# Altium PCB Example_IMX5_GPX1.PcbDoc
Units mm, origin at the board's own origin, x right, y up, seen from the top; angles counter-clockwise.
Board outline 136.53 x 135.25 mm, 2 copper layers (Top Layer, Bottom Layer), stack 1.595 mm thick; 10 components, 17 nets, 112 pads, 0 vias.
Unrouted connection lines stored in the file: 55.
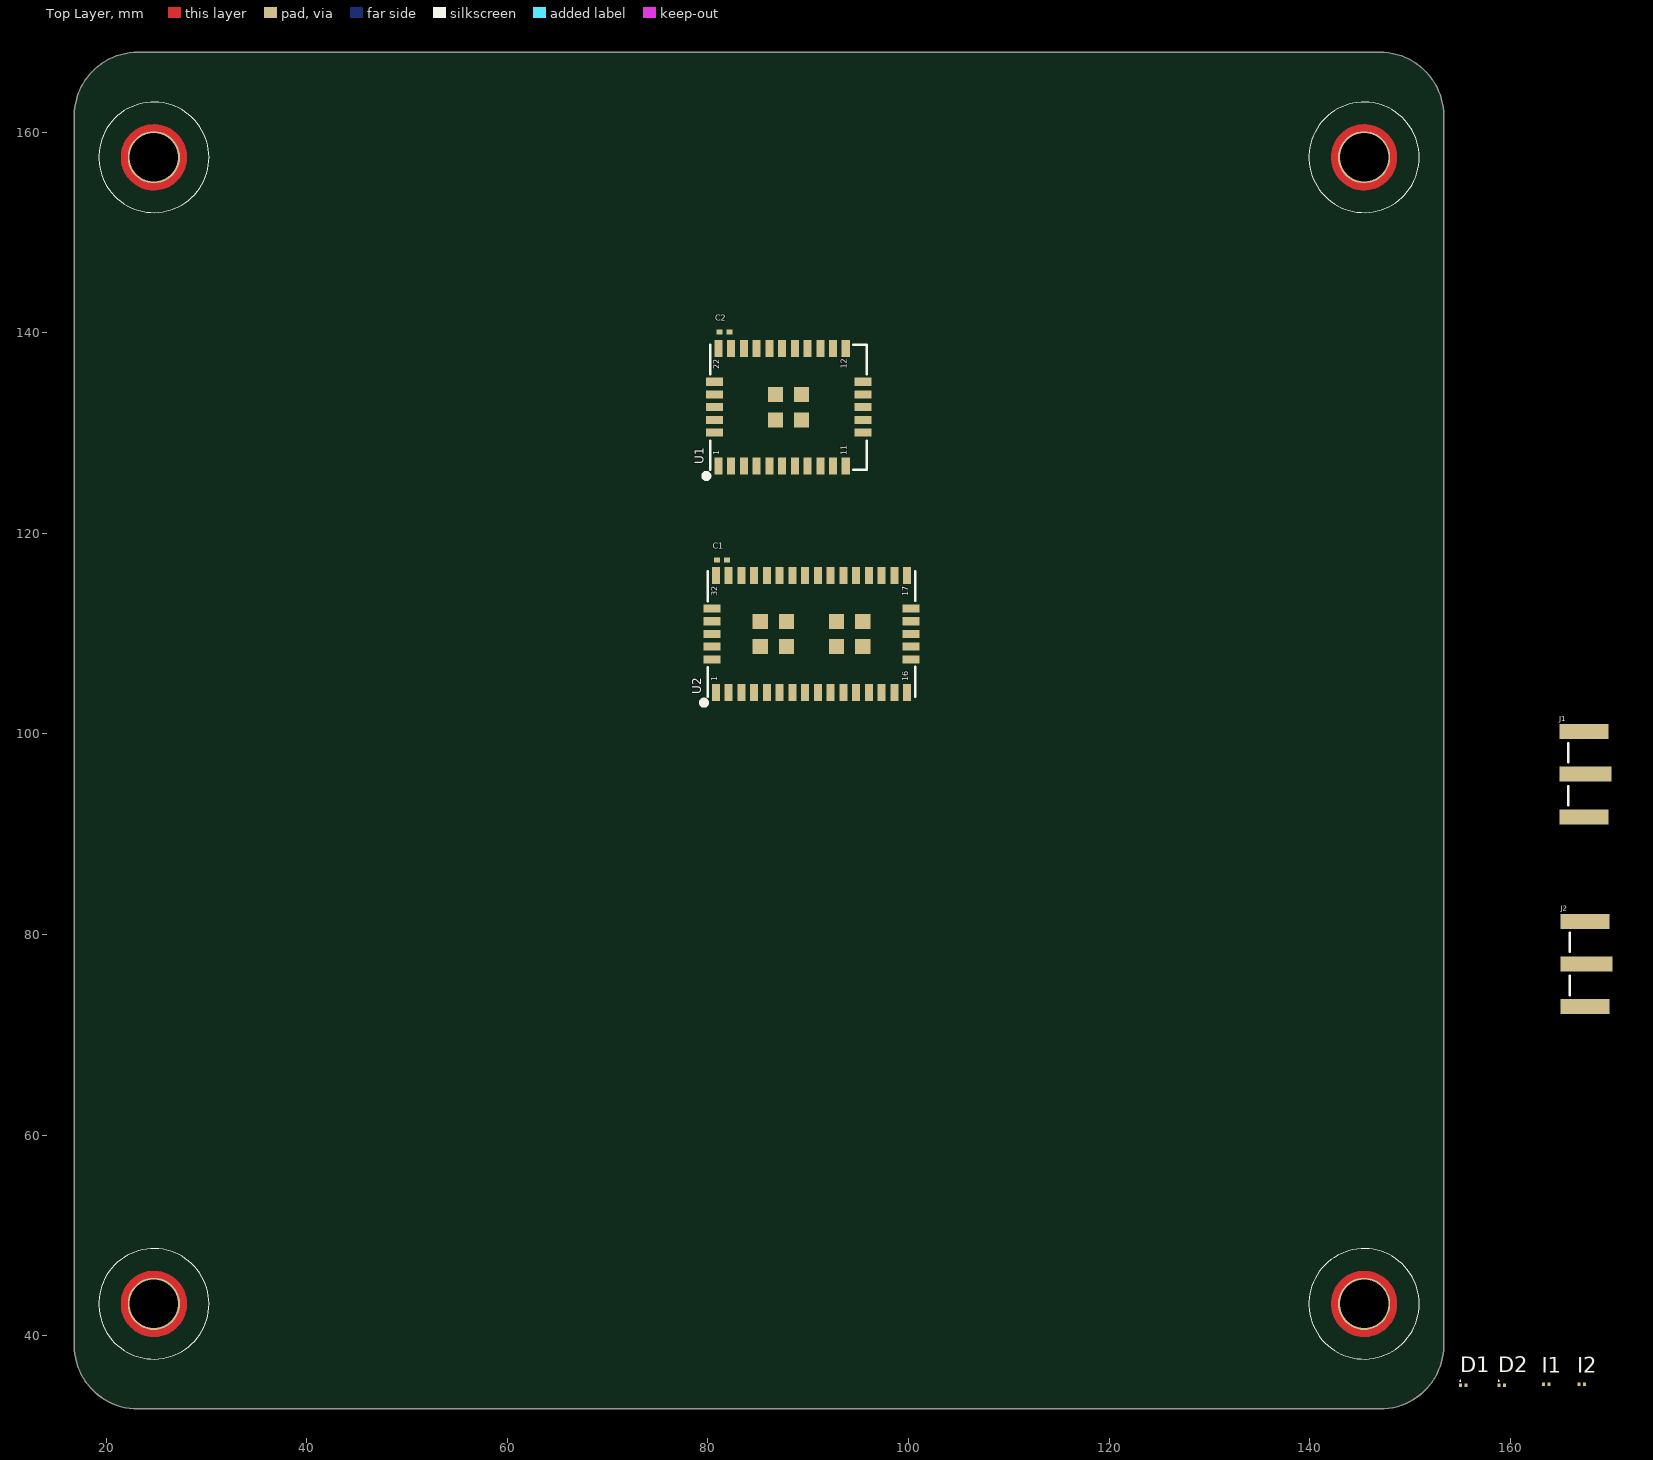
[diagram p0: Top Layer view]
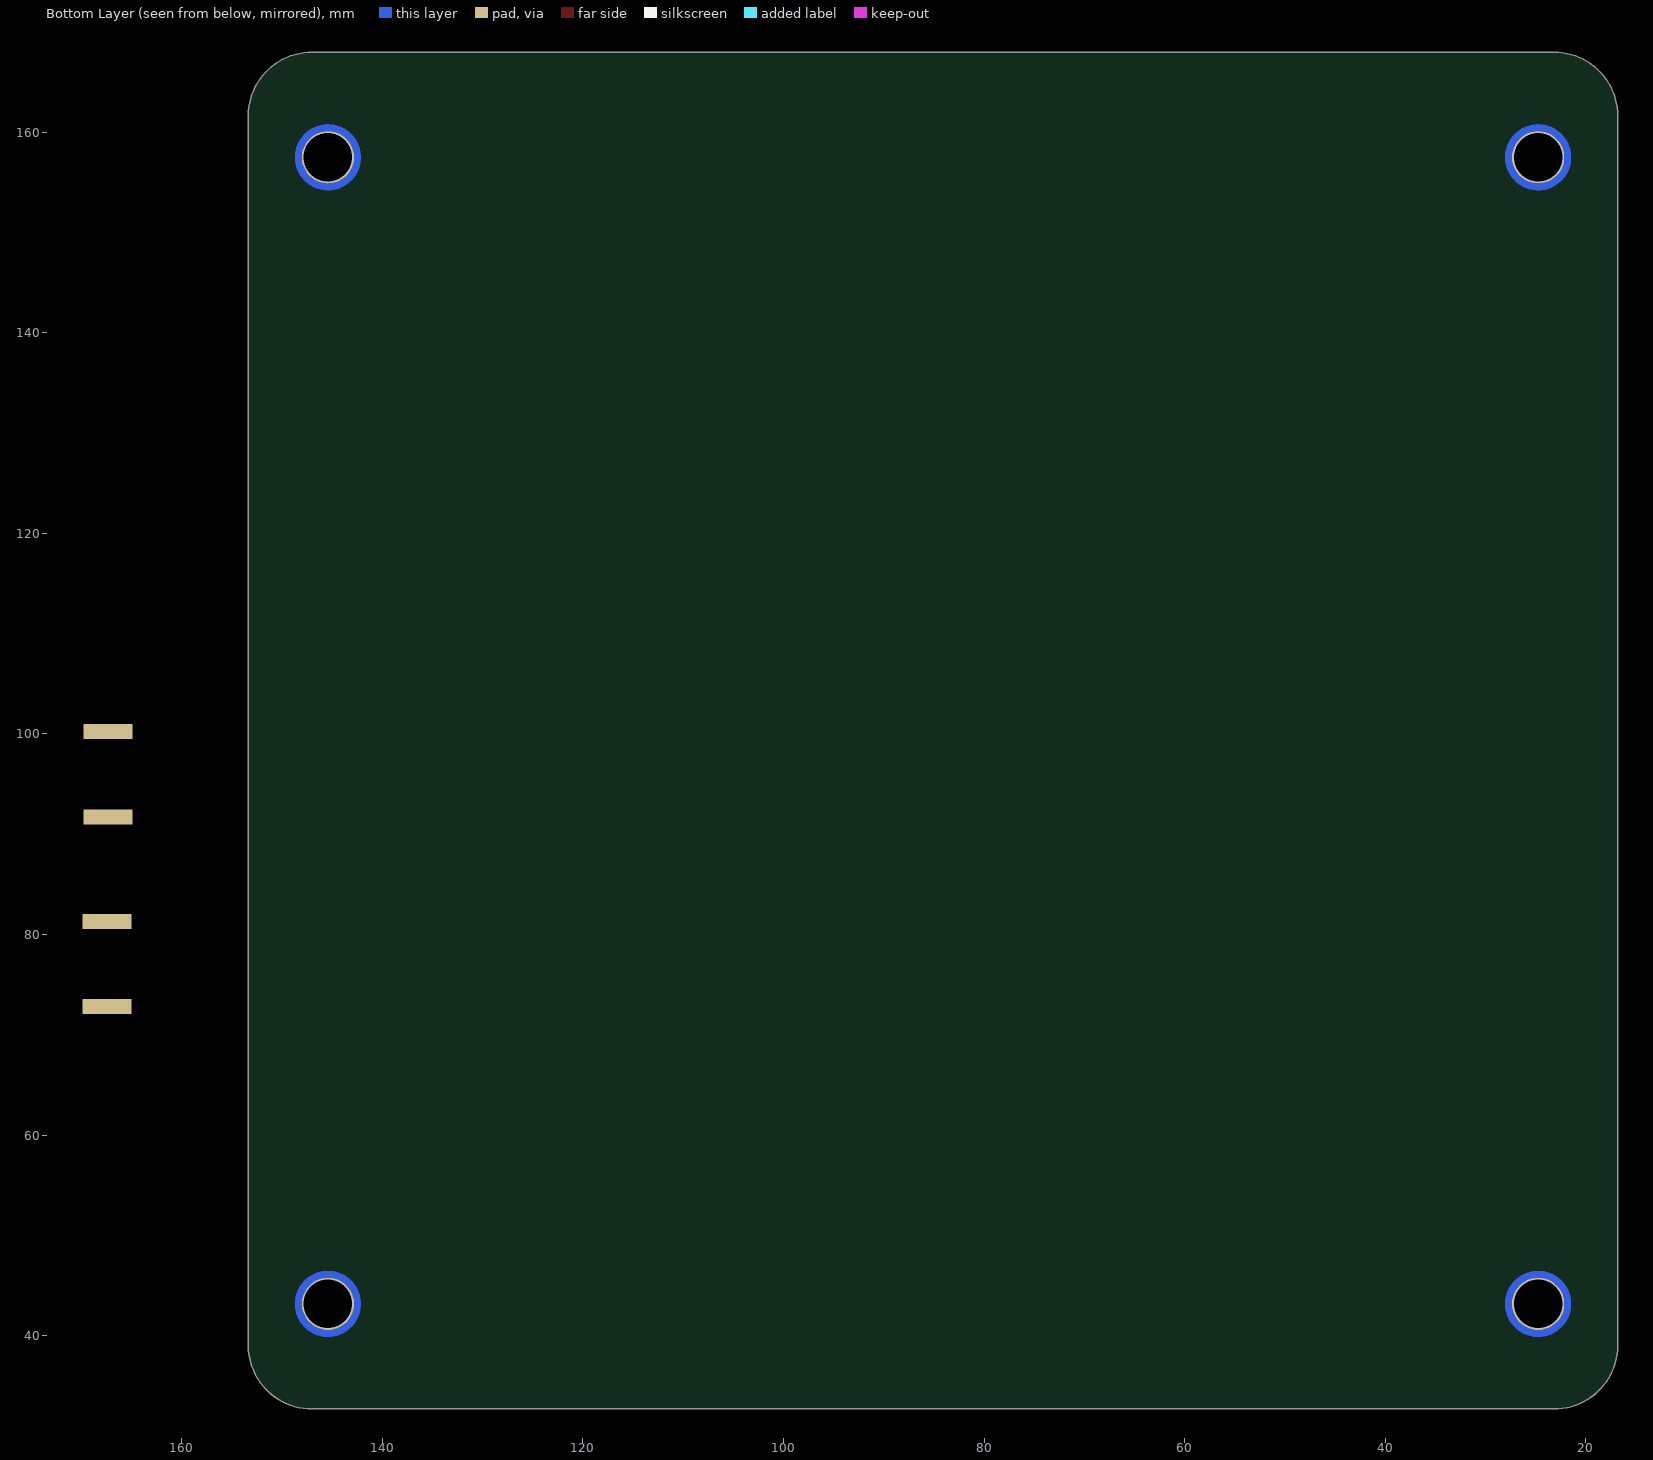
[diagram p1: Bottom Layer view, seen from below]

## Layer stack, top to bottom
Top Solder: solder mask 0.0102, Solder Resist, Dk 3.5
Top Layer: signal copper 0.0356
Dielectric 1: core 1.524, FR4, Dk 4.3
Bottom Layer: signal copper 0.0356
Bottom Solder: solder mask 0.0102, Solder Resist, Dk 3.5

## Board outline
16.828,39.052 16.827,161.607 cw(c23.177,161.607) 23.177,167.957 147.002,167.957 cw(c147.002,161.607) 153.352,161.607 153.352,39.052 cw(c147.002,39.052) 147.002,32.703 23.177,32.703 cw(c23.177,39.052)

## Design rules (kind name [scope] priority, off if disabled: settings)
AssemblyTestPointUsage [All] p1 off:
AssemblyTestpoint [All] p1 off: testpointundercomponent=TRUE minsize=1.016 maxsize=2.54 preferedsize=1.524 minholesize=0 maxholesize=1.016 preferedholesize=0.813 testpointgrid=0.025 usegrid=TRUE gridtolerance=0 allowsidetop=TRUE allowsidebottom=TRUE
BoardOutlineClearance [All] p1: gap=0.254 ignorepadtopadclearanceinfootprint=FALSE except(0: Arc-SplitContinuation Track-SplitContinuation SMDPad-SplitContinuation THPad-SplitContinuation Via-SplitContinuation Fill-SplitContinuation Poly-SplitContinuation Region-SplitContinuation Text-SplitContinuation; 0.508: Arc-OutlineEdge Track-OutlineEdge SMDPad-OutlineEdge THPad-OutlineEdge Via-OutlineEdge Fill-OutlineEdge Poly-OutlineEdge Region-OutlineEdge Text-OutlineEdge)
Clearance [All] p1: gap=0.127 ignorepadtopadclearanceinfootprint=FALSE except(0: Arc-Hole Track-Hole SMDPad-Hole THPad-Hole Via-Hole Fill-Hole Poly-Hole Region-Hole Text-Hole)
ComponentClearance Ignore [InComponent('H7')] p1: gap=-12.7 collisioncheckmode=3 verticalgap=-12.7 showdistances=FALSE
ComponentClearance HeaderClearance [InComponent('H1')] p2: gap=0.254 collisioncheckmode=3 verticalgap=-0.254 showdistances=FALSE
ComponentClearance Default [All] p3: gap=0.254 collisioncheckmode=3 verticalgap=0.254 showdistances=FALSE
ComponentClearance [All] p4: gap=0.254 collisioncheckmode=3 verticalgap=0.254 showdistances=FALSE
FabricationTestPointUsage [All] p1 off: valid=0 allowmultiple=FALSE
FabricationTestpoint [All] p1 off: side=3 testpointundercomponent=TRUE minsize=1.016 maxsize=2.54 preferedsize=1.524 minholesize=0 maxholesize=1.016 preferedholesize=0.813 testpointgrid=0.025 allowsidetop=TRUE allowsidebottom=TRUE usegrid=TRUE gridtolerance=0
HoleSize [All] p1: absolutevalues=TRUE maxlimit=2.54 minlimit=0.305 maxpercent=80.000 minpercent=20.000
MinimumAnnularRing [All] p1: minimumring=0.15
MinimumSolderMaskSliver MinimumSolderMaskSliver_Tight [HasFootprint('QFN40P300X300X105_HS-25L') OR HasFootprint('R0201x4') OR HasFootprint('R0201x2') OR HasFootprint('QFN50P300X200X60_HS-9L') OR HasFootprint('TSST8') OR HasFootprint('SOT23-8-65P280X145-8N') OR HasFootprint('TSOP65P640X120-24N') OR HasFootprint('SOTFL50P160X60-5N')] p1: minsoldermaskwidth=0.025
MinimumSolderMaskSliver [All] p2: minsoldermaskwidth=0.076
PlaneClearance [All] p1: clearance=0.127
PlaneConnect "Power Plane Connect Style" [All] p1: planeconnectstyle=Direct reliefexpansion=0.508 reliefentries=4 reliefconductorwidth=0.178 reliefairgap=0.254
PlaneConnect [All] p2: planeconnectstyle=Relief reliefexpansion=0.508 reliefentries=4 reliefconductorwidth=0.254 reliefairgap=0.254
PolygonConnect "Direct Connect" [InPolygonClass('NO THERMALS')] p1: connectstyle=Direct reliefconductorwidth=0.254 reliefentries=4 polygonreliefangle="90 Angle" airgapwidth=0.254
PolygonConnect "GND Vias" [InNet('GND') AND IsVia] p2: connectstyle=Direct reliefconductorwidth=0.254 reliefentries=4 polygonreliefangle="90 Angle" airgapwidth=0.254
PolygonConnect "Default Polygon Connect" [All] p3: connectstyle=Relief reliefconductorwidth=0.254 reliefentries=4 polygonreliefangle="90 Angle" airgapwidth=0.254
PolygonConnect [All] p4: connectstyle=Relief reliefconductorwidth=0.254 reliefentries=4 polygonreliefangle="90 Angle" airgapwidth=0.254
RoomDefinition Main [InComponentClass('Main')] p1: confinementstyle=ConfineIn formatcopy=TRUE lockcomponents=FALSE outline 0,0 50.8,0 50.8,25.4 0,25.4
RoutingVias [All] p1: holewidth=0.35 width=0.65 viastyle="Through Hole" minholewidth=0.3 minwidth=0.6 maxholewidth=0.4 maxwidth=0.7
ShortCircuit EmptyPad [InPadClass('All Pads') vs InNet('No Net')] p2: allowed=TRUE
SilkToSilkClearance [Not ( ((ObjectKind = 'Text') And ((UseInvertedRectangle = 'True') OR (IsTextInverted = 'True'))) OR (ObjectKind = 'Fill') ) vs Not ( ((ObjectKind = 'Text') And ((UseInvertedRectangle = 'True') OR (IsTextInverted = 'True'))) OR (ObjectKind = 'Fill') )] p1: silktosilkclearance=0.076
SilkToSolderMaskClearance SilkscreenOverComponentPads [NOT(IsPad AND OnLayer('Multi-Layer'))] p1: minsilkscreentomaskgap=0 clearancetoexposedcopper=TRUE
SilkToSolderMaskClearance [IsPad] p2: minsilkscreentomaskgap=0.1 clearancetoexposedcopper=TRUE
SolderMaskExpansion Tented [IsVia AND (InNet('VIN') OR InNet('VINP') OR InNet('+3.3V'))] p1: expansion=-0.762 istentingtop=FALSE
SolderMaskExpansion "SolderMaskExpansion GND Vias" [IsVia AND InNet('GND')] p2: expansion=-0.762 istentingtop=FALSE
SolderMaskExpansion "SolderMaskExpansion Vias" [IsVia] p3: expansion=-0.762 istentingtop=FALSE
SolderMaskExpansion "Solder Mask Expansion" [All] p4: expansion=0.076 istentingtop=FALSE
SolderMaskExpansion [All] p5: expansion=0.102 istentingtop=FALSE
Width [All] p1: maxlimit=0.381 minlimit=0.127 preferedwidth=0.152 minimp=50.000000 maximp=50.000000 favimp=50.000000
19 further rules are at their usual default settings.

## Classes and differential pairs
net class RF_GPS: GPS1_ANT GPS2_ANT

## Components (designator, comment, footprint, x,y, rotation, side; value= is the part's Value field where it differs from the comment)
C1 "Cap" 0402 81.407,117.348 r0 top value=0.1uF
C2 "Cap" 0402 81.669,140.081 r0 top value=0.1uF
D1 "Diode - Bidirectional Zener" D0201 155.321,35.052 r0 top
D2 "Diode - Bidirectional Zener" D0201 159.131,35.052 r0 top
I1 "Inductor" 0201 163.576,35.179 r0 top value=33nH
I2 "Inductor" 0201 167.132,35.179 r0 top value=33nH
J1 "RF - GND x 4" "RF SMA End Launch 2" 170.576,95.988 r270 top locked
J2 "RF - GND x 4" "RF SMA End Launch 2" 170.703,77.065 r270 top locked
U1 "IMX" IS-IMX-5.0 80.241,126.318 r90 top
U2 "GPX" IS-GPX-1.0 80.002,103.712 r90 top

## Footprints (in the part's own frame and the unit in brackets; to place one, negate y for a bottom-side part, rotate by r counter-clockwise, add the part's x,y. Pads: shape width x height; smd on the part's side, far side on the other; paste and mask are expansions set on the pad)
0201 [mm]
  rect 0.3x0.35 smd: 1(-0.275,0) 2(0.275,0)
  body extent -0.3,-0.15 0.3,0.15, height 0.31
0402 [mm] "Chip Capacitor, Body 1.0x0.5mm, IPC High Density"
  rect 0.6x0.5 smd: 1(-0.5,0) 2(0.5,0)
  body extent -0.55,-0.3 0.55,0.3, height 1.3
D0201 [mm]
  rect 0.3x0.35 smd: 1(-0.275,0) 2(0.275,0)
  silkscreen extent -0.35,0.4 -0.25,0.5, body extent -0.32,-0.17 0.31,0.16, height 0.32
IS-GPX-1.0 [mm] "Inerial Sense GPX-1.0, 42pins 1.27mm pitch"
  rect 1.5x1.5 smd: 0(5,-5.215) 0(5,-15.435) 0(5,-12.835) 0(5,-7.815) 0(7.5,-7.815) 0(7.5,-5.215) 0(7.5,-15.435) 0(7.5,-12.835)
  rect 1.7x0.8 smd paste-2.54: 1(0.4,-0.8) 2(0.4,-2.07) 3(0.4,-3.34) 4(0.4,-4.61) 5(0.4,-5.88) 6(0.4,-7.15) 7(0.4,-8.42) 8(0.4,-9.69) 9(0.4,-10.96) 10(0.4,-12.23) 11(0.4,-13.5) 12(0.4,-14.77) 13(0.4,-16.04) 14(0.4,-17.31) 15(0.4,-18.58) 16(0.4,-19.85) 17(12.1,-19.85) 18(12.1,-18.58) 19(12.1,-17.31) 20(12.1,-16.04) 21(12.1,-14.77) 22(12.1,-13.5) 23(12.1,-12.23) 24(12.1,-10.96) 25(12.1,-9.69) 26(12.1,-8.42) 27(12.1,-7.15) 28(12.1,-5.88) 29(12.1,-4.61) 30(12.1,-3.34) 31(12.1,-2.07) 32(12.1,-0.8)
  rect 0.8x1.7 smd paste-2.54: 33(3.71,-20.25) 34(4.98,-20.25) 35(6.25,-20.25) 36(7.52,-20.25) 37(8.79,-20.25) 38(8.79,-0.4) 39(7.52,-0.4) 40(6.25,-0.4) 41(4.98,-0.4) 42(3.71,-0.4)
  silkscreen extent -0.85,-20.65 12.5,0.65, body extent 0,-20.65 12.5,0, height 2.88
IS-IMX-5.0 [mm] "Inerial Sense IMX-5.0, 22pins 1.27mm pitch"
  rect 1.5x1.5 smd: 0(5,-9.1) 0(5,-6.5) 0(7.5,-9.1) 0(7.5,-6.5)
  rect 1.7x0.8 smd paste-2.54: 1(0.4,-0.8) 2(0.4,-2.07) 3(0.4,-3.34) 4(0.4,-4.61) 5(0.4,-5.88) 6(0.4,-7.15) 7(0.4,-8.42) 8(0.4,-9.69) 9(0.4,-10.96) 10(0.4,-12.23) 11(0.4,-13.5) 12(12.1,-13.5) 13(12.1,-12.23) 14(12.1,-10.96) 15(12.1,-9.69) 16(12.1,-8.42) 17(12.1,-7.15) 18(12.1,-5.88) 19(12.1,-4.61) 20(12.1,-3.34) 21(12.1,-2.07) 22(12.1,-0.8)
  rect 0.8x1.7 smd paste-2.54: 23(3.71,-15.2) 23(4.98,-15.2) 23(6.25,-15.2) 23(7.52,-15.2) 23(8.79,-15.2) 24(3.71,-0.4) 24(4.98,-0.4) 24(6.25,-0.4) 24(7.52,-0.4) 24(8.79,-0.4)
  silkscreen extent -0.85,-15.6 12.5,0.65, body extent 0,-15.6 12.5,0, height 2.89
"RF SMA End Launch 2" [mm] "RF SMA End Launch Jack"
  rect 1.5x5.2 smd: 1(0,-3.1)
  rect 1.5x4.9 smd: 2(-4.25,-3.25) 3(4.25,-3.25)
  rect 1.5x4.9 smd far side: 4(-4.25,-3.25) 5(4.25,-3.25)
  Top Layer pour cut-out: -0.95,-0.5 -0.95,0 0.95,0 0.95,-0.5
  silkscreen extent -3.1,-4.8 3.1,-4.8, body extent -4.75,-4.74 4.77,9.54, height 4.34

## Part data
C1 C2: "Capacitor", Category=Capacitors, LatestRevisionDate=17-Jul-2002, LatestRevisionNote="Re-released for DXP Platform.", Published=8-Jun-2000, Publisher="Altium Limited"
D1 D2: "TVS DIODE 12VC 6A IPP 0201", Capacitance @ Frequency="10pF @ 1MHz", Current - Peak Pulse (10/1000µs)="6A (8/20µs)", Manufacturer="AVX Corporation", Manufacturer Part Number=GG020105100N2P, Operating Temperature="-40°C ~ 125°C (TJ)", Package / Case="0201 (0603 Metric)", Power - Peak Pulse=60W, Power Line Protection=No, Supplier Device Package=0201, Supplier Part Number 1=478-10590-2-ND, Voltage - Breakdown (Min)=5.5V, Voltage - Clamping (Max) @ Ipp=12V, Voltage - Reverse Standoff (Typ)=5V, Applications="General Purpose", Bidirectional Channels=1, Category="Circuit Protection", ComponentLink1Description=http://datasheets.avx.com/AVX-GiGuard.pdf, ComponentLink1URL=http://datasheets.avx.com/AVX-GiGuard.pdf, Mounting Type="Surface Mount", Packaging="Tape & Reel (TR)", Pricing 1="15000=0.0482, 30000=0.04536, 75000=0.04253, 105000=0.0378 (USD)", RoHS="RoHS Compliant", Stock 1=15000, Supplier 1=Digi-Key, Type=Zener, Unidirectional Channels=-
J1 J2: "CONN SMA RCPT STR 50OHM EDGE MNT", Case/Package=SMA, Dielectric Material=PTFE, Housing Colour=Gold, Manufacturer=Molex, Manufacturer Part Number=0732511150, Max Frequency=18GHz, Max Operating Temperature=165°C, Min Operating Temperature=-65°C, Package Quantity=1600, Supplier Part Number 1=WM5534-ND, Voltage Rating=500V, Body Material=Brass, Body Plating=Gold, Connector Type=SMA,Socket, Contact Material=Copper, Contact Plating=Gold, Depth=9.53mm, Fastening Type=Threaded, Impedance=50R, Insulation Material=Polytetrafluoroethylene, Lead Free="Lead Free", Length=9.53mm, Mount=Edge, Packaging=Tray, Pricing 1="1=3.33, 10=3.193, 25=2.9272, 50=2.7942, 100=2.6612, 250=2.32856, 500=2.26202, 1600=1.86284, 3200=1.79631 (USD)", Radiation Hardening=No, Stock 1=22842, Supplier 1=Digi-Key, Termination=Solder
U1: library part IS-IMX-5.0, "Inertial Sense IMX", Manufacturer="Inertial Sense", Manufacturer Part Number=IS-IMX-5, Supplier 1="Inertial Sense", Supplier Part Number 1=IS-IMX-5
U2: library part IS-GPX-1.0, "Inertial Sense GPX", Manufacturer="Inertial Sense", Manufacturer Part Number=IS-GPX-1, Supplier 1="Inertial Sense", Supplier Part Number 1=IS-GPX-1

## Free pads (board coordinates)
  round 5.207 hole 4.826 unplated: 0(24.765,43.18) 0(24.765,157.48) 0(145.415,43.18) 0(145.415,157.48)

## Nets (pads, with @x,y where several pads share a name; then routed paths per layer and width w, separated by ;. In a path a pad name is that pad's centre, name@x,y a point inside that pad or via, vN(x,y) a via of type N, cw(c..) or ccw(c..) an arc to the next point about the centre after c; other vN are vias at no path point)
+3.3V: C1.1 C2.1 U1.22 U2.32
GND: C1.2 C2.2 D1.2 D2.2 J1.2 J1.3 J1.4 J1.5 J2.2 J2.3 J2.4 J2.5 U1.0 U1.11 U1.21 U1.23 U1.24 U2.0 U2.11 U2.12 U2.16 U2.31
GNSS1_PPS: U1.20 U2.30
GNSS_Rx: U1.19 U2.28
GNSS_Tx: U1.18 U2.29
GPS1_ANT: D1.1 I1.1 J1.1 U2.13
GPS2_ANT: D2.1 I2.1 J2.1 U2.15
IMX_C\S\: U1.8
IMX_nSPI_EN/STROBE: U1.10
IMX_Rx1/MOSI: U1.6
IMX_SCLK: U1.9
IMX_Tx1/MISO: U1.7
IMX_USB.D_N: U1.2
IMX_USB.D_P: U1.1
nRESET: U1.12 U2.22
VANT: I1.2 I2.2 U2.14
VBAT: U1.3 U2.3
pads on no net: U1.4 U1.5 U1.13 U1.14 U1.15 U1.16 U1.17 U2.1 U2.2 U2.4 U2.5 U2.6 U2.7 U2.8 U2.9 U2.10 U2.17 U2.18 U2.19 U2.20 U2.21 U2.23 U2.24 U2.25 U2.26 U2.27 U2.33 U2.34 U2.35 U2.36 U2.37 U2.38 U2.39 U2.40 U2.41 U2.42

## Other copper
Multi-Layer:
  circle w1.016: c145.415,157.48 r2.794
  circle w1.016: c24.765,157.48 r2.794
  circle w1.016: c145.415,43.18 r2.794
  circle w1.016: c24.765,43.18 r2.794

## Silkscreen, mask and mechanical layers (free items; w line width, h text height)
Top Overlay:
  circle w0.1: c145.415,157.48 r5.5
  circle w0.1: c24.765,157.48 r5.5
  circle w0.1: c145.415,43.18 r5.5
  circle w0.1: c24.765,43.18 r5.5
Mechanical 15:
  lines w0.3: 16.828,39.052 ccw(c23.177,39.052) 23.177,32.703 147.002,32.703 ccw(c147.002,39.052) 153.352,39.052 ; 16.828,161.607 cw(c23.177,161.607) 23.177,167.957 147.002,167.957 cw(c147.002,161.607) 153.352,161.607
Mechanical 16:
  text "Dimensions in mm" at 84.328,99.331 h1.52
Board Outline:
  the board outline again, w0.3

## Dimensions
90.092,103.262 to 90.562,103.262 on Mechanical 16
85.012,103.262 to 86.282,103.262 on Mechanical 16
88.567,107.962 to 87.067,107.962 on Mechanical 16
85.967,107.962 to 84.467,107.962 on Mechanical 16
88.567,107.962 to 84.467,107.962 on Mechanical 16
100.252,116.662 to 85.967,111.962 on Mechanical 16
100.252,116.662 to 88.567,111.962 on Mechanical 16
84.467,111.962 to 80.402,116.662 on Mechanical 16
100.252,116.662 to 93.587,111.962 on Mechanical 16
100.252,116.662 to 96.187,111.962 on Mechanical 16
100.252,114.962 to 96.187,109.462 on Mechanical 16
100.252,114.962 to 101.102,112.902 on Mechanical 16
80.402,114.962 to 79.552,112.902 on Mechanical 16
92.087,107.962 to 92.087,109.462 on Mechanical 16
92.087,110.462 to 92.087,111.962 on Mechanical 16
92.087,107.962 to 92.087,111.962 on Mechanical 16
80.402,114.962 to 79.552,112.902 on Mechanical 16
80.402,103.262 to 80.402,104.962 on Mechanical 16
80.402,103.262 to 81.202,103.262 on Mechanical 16
96.187,111.962 to 100.417,114.962 on Mechanical 16
100.252,104.962 to 100.252,114.962 on Mechanical 16

## Text inside footprints (layer, text, board x,y; h text height)
U1: Top Overlay "22" at 81.341,136.366 h1.02 r90; Top Overlay "12" at 94.041,136.393 h1.02 r90; Top Overlay "11" at 94.041,127.791 h1.02 r90; Top Overlay "1" at 81.341,127.791 h1.02 r90
U2: Top Overlay "32" at 81.145,113.745 h1.02 r90; Top Overlay "17" at 100.195,113.745 h1.02 r90; Top Overlay "16" at 100.195,105.236 h1.02 r90; Top Overlay "1" at 81.145,105.236 h1.02 r90